# Altium PCB uku201.PcbDoc
Units mm, origin at the board's own origin, x right, y up, seen from the top; angles counter-clockwise.
Board outline 144.5 x 170.55 mm, 2 copper layers (Top Layer, Bottom Layer); 110 components, 672 nets, 418 pads, 156 vias.
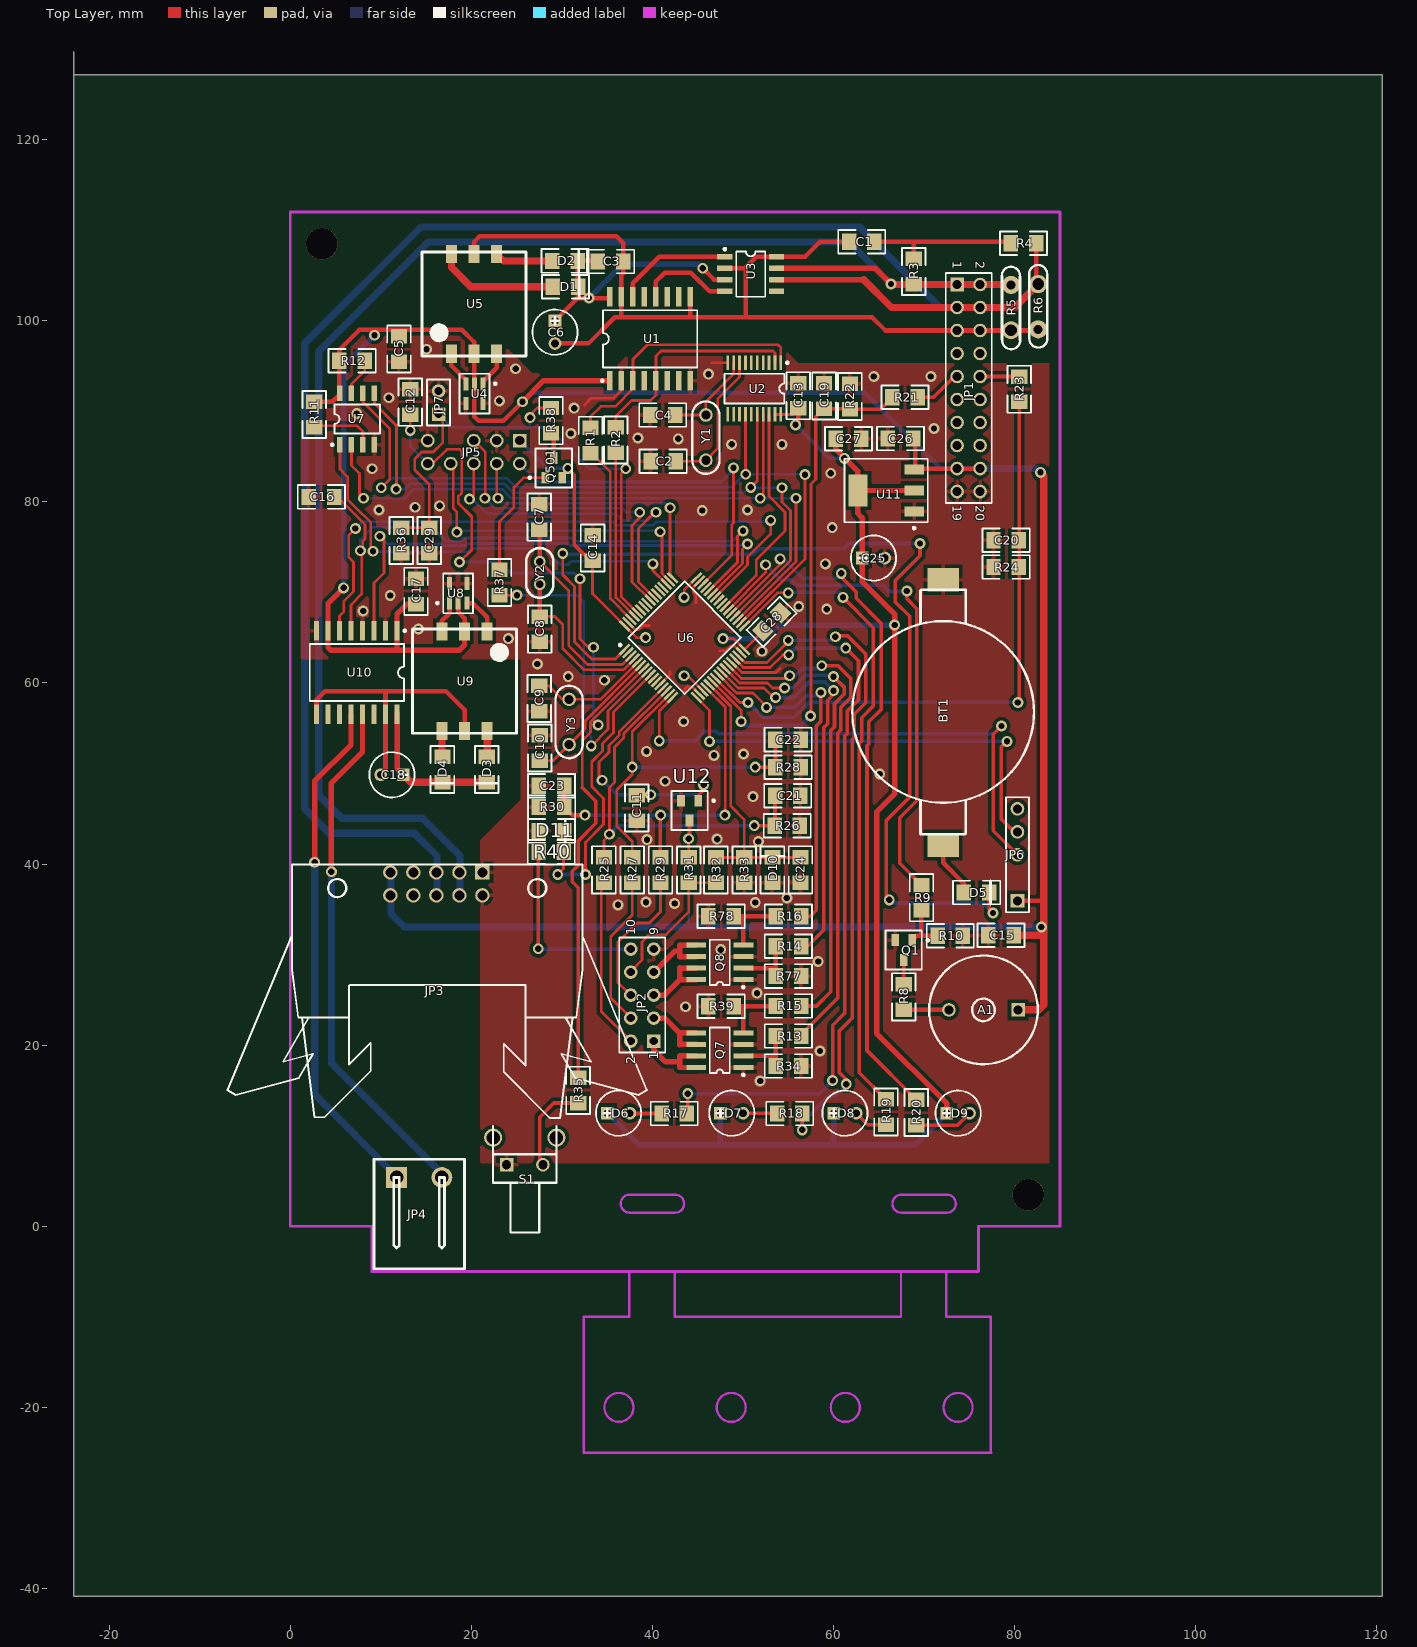
[diagram p0: Top Layer view]
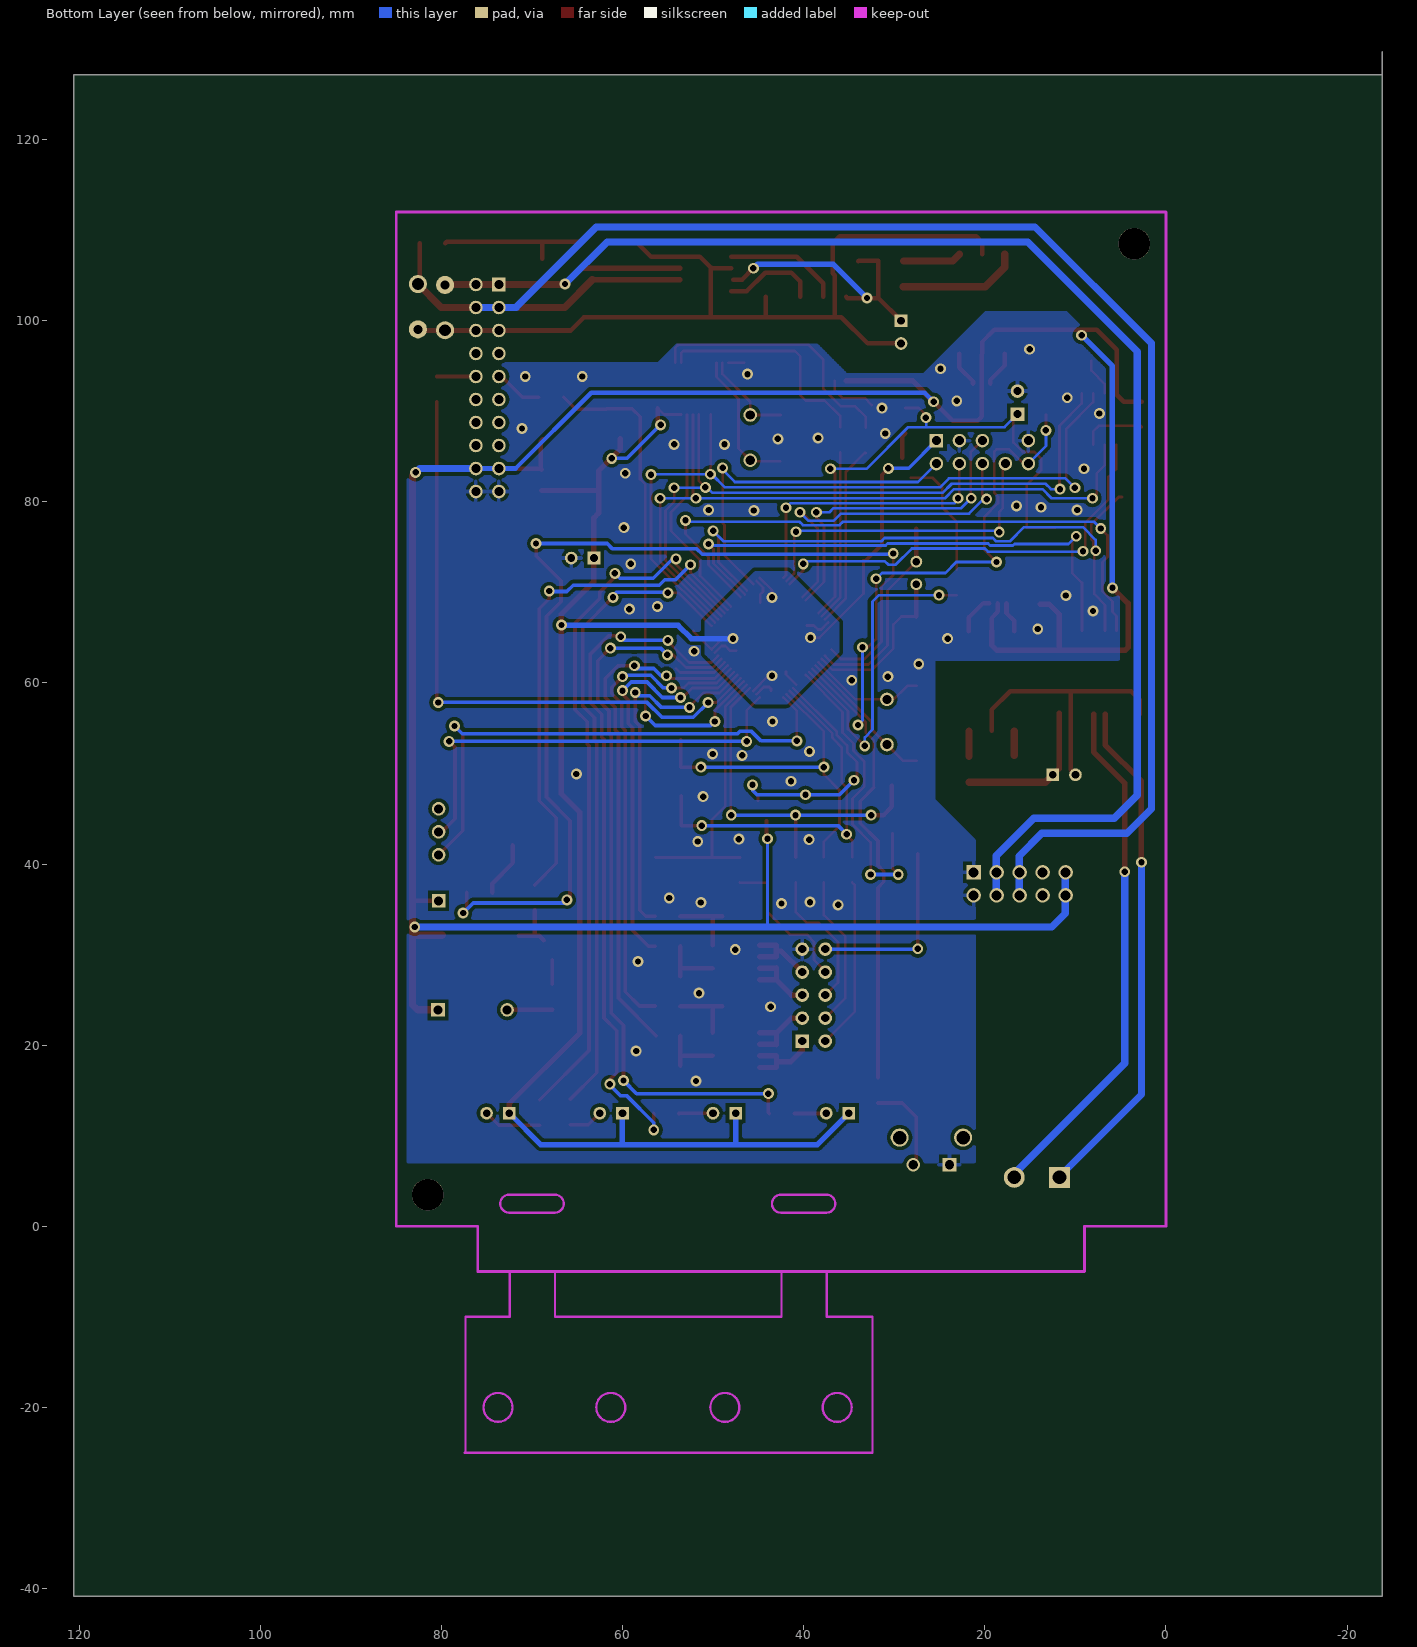
[diagram p1: Bottom Layer view, seen from below]

## Layer stack, top to bottom
Top Layer: signal copper 0.0356
Dielectric: dielectric 0.32, FR-4, Dk 4.8
Bottom Layer: signal copper 0.0356

## Board outline
-23.9,129.7 -23.9,-40.85 120.6,-40.85 120.6,127.15 -23.9,127.15

## Design rules (kind name [scope] priority, off if disabled: settings)
Clearance Keep_Out [OnLayer('Keep-Out Layer') vs not OnLayer('Top Overlay')] p1: gap=1
Clearance Holes [InPoly vs HasPad('Free-0') Or HasPad('Free-1') Or HasPad('Free-2') Or HasPad('Free-3')] p2: gap=2
Clearance Clearance_3 [InPoly and InNet(NetC500_1)] p3: gap=1
Clearance Poly [InPoly] p4: gap=0.4
Clearance [All] p5: gap=0.18
ComponentClearance [All] p1: gap=0.254 collisioncheckmode=0
HoleSize [All] p1: absolutevalues=TRUE maxlimit=5 minlimit=0 maxpercent=80.000 minpercent=20.000
PolygonConnect PolygonConnect_2 [InNet('NetC500_1')] p1: connectstyle=Relief reliefconductorwidth=1 reliefentries=4 polygonreliefangle="90 Angle"
PolygonConnect PolygonConnect_1 [InNet(NetC100_2)] p2: connectstyle=Direct reliefconductorwidth=0.254 reliefentries=4 polygonreliefangle="90 Angle"
PolygonConnect [All] p3: connectstyle=Relief reliefconductorwidth=0.4 reliefentries=4 polygonreliefangle="90 Angle"
RoutingLayers [All] p1: top layer=Horizontal bottom layer=Vertical
RoutingVias [All] p1: holewidth=0.7 width=1.2 viastyle="Through Hole" minholewidth=0.6 minwidth=1.1 maxholewidth=0.7 maxwidth=1.2
SolderMaskExpansion [All] p1: expansion=0.102
TestPointUsage [All] p1: valid=0 allowmultiple=FALSE
Testpoint [All] p1: side=15 testpointundercomponent=TRUE minsize=1.016 maxsize=2.54 preferedsize=1.524 minholesize=0 maxholesize=1.016 preferedholesize=0.813 testpointgrid=0.025 style=1023 order=1234567890
Width [All] p1: maxlimit=5 minlimit=0.2 preferedwidth=0.254 toplayer_prefwidth=0.5 bottomlayer_prefwidth=0.4 minimp=50.000000 maximp=50.000000 favimp=50.000000
15 further rules are at their usual default settings.

## Classes and differential pairs
component class cpu_board: A1 A7 BT1 C7 C8 C9 C10 C11 C12 C13 C14 C15 C19 C20 C21 C22 C23 C24 C25 C26 C27 C28 C29 C? D5 D6 D7 D8 D9 D10 D11 JP1 JP2 JP3 JP4 JP5 JP6 JP7 NetC20_1 Q1 Q7 Q8 Q501 R8 R9 R10 R11 R12 R13 R14 R15 R16 R17 R18 R19 R20 R21 R22 R23 R24 R25 R26 R27 R28 R29 R30 R31 R32 R33 R34 R35 R36 R37 R38 R39 R40 R77 R78 S1 U6 U7 U11 U12 U? Y2 Y3
component class RS485: C16 C17 C18 D3 D4 U8 U9 U10
component class CAN: C1 C2 C3 C4 C5 C6 D1 D2 R1 R2 R3 R4 R5 R6 U1 U2 U3 U4 U5 Y1

## Components (designator, comment, footprint, x,y, rotation, side; value= is the part's Value field where it differs from the comment)
A1 "HCM1205X" zumm 76.55,23.9 r180 top (schematic designator A?)
BT1 "796136-1" BAT_HOLD_SMD 72.1,42.1 r90 top
C1 "100n" _1206 63.1,108.7 r180 top
C2 "10pF" _1206 41.2,84.5 r0 top (schematic designator C?)
C3 "22.0" _1206 35.4,106.55 r0 top
C4 "10pF" _1206 41.15,89.6 r0 top
C5 "1.0" _1206 12,96.9 r90 top
C6 "LXZ 220x16" el3 29.25,100 r270 top
C7 "33pF" _1206 27.5,78.3 r270 top
C8 "33pF" _1206 27.55,65.95 r90 top
C9 "10pF" _1206 27.5,58.3 r90 top
C10 "10pF" _1206 27.55,52.8 r270 top
C11 "10.0" _1206 38.25,46.2 r90 top
C12 "1.0" _1206 13.25,91 r270 top
C13 "1.0" _1206 56.1,91.7 r270 top
C14 "1.0" _1206 33.4,74.9 r270 top
C15 "1.0" _1206 78.5,32.15 r0 top
C16 "1n0" _1206 3.45,80.55 r0 top
C17 "1.0" _1206 13.9,70.1 r270 top
C18 "LXZ 220x16" el3 12.5,49.85 r180 top
C19 "1.0" _1206 58.95,91.7 r90 top
C20 "1.0" _1206 79.05,75.75 r180 top
C21 "1.0" _1206 54.95,47.55 r0 top
C22 "1.0" _1206 55,53.75 r0 top
C23 "1.0" _1206 28.85,48.65 r180 top
C24 "1.0" _1206 56.359,39.35 r270 top
C25 "LXZ 220x16" el3 63.15,73.8 r0 top (schematic designator C?)
C26 "1.0" _1206 67.4,87 r0 top
C27 "1.0" _1206 61.65,86.95 r180 top
C28 "1.0" _1206 53.15,66.75 r225 top
C29 "1.0" _1206 15.35,75.75 r90 top
D1 "MBR0520" _1206d 30.4,103.75 r180 top
D2 "MBR0520" _1206d 30.35,106.597 r180 top
D3 "MBR0520" _1206d 21.7,50.45 r90 top
D4 "MBR0520" _1206d 16.8,50.45 r90 top
D5 "BAV103" _1206d 75.8,36.85 r180 top
D6 "LED0" el3 35,12.5 r0 top
D7 "LED0" el3 47.5,12.5 r0 top
D8 "LED0" el3 60,12.5 r0 top
D9 "LED0" el3 72.5,12.5 r0 top
D10 "BZV55-C5V6" _1206d 53.259,39.35 r270 top
D11 "BZV55-C3V3" _1206d 28.852,43.65 r180 top
JP1 "PBD-10" HDR2X10 73.65,104 r270 top (schematic designator JP?)
JP2 "PBD-10" HDR2X5 40.15,20.45 r90 top
JP3 "LBH-10R" SCM-10MR 6,36.55 r0 top
JP4 "Header 2" 2EDGR-5.0-2P 11.75,5.4 r0 top
JP5 "CORTEX_DEBUG_CONNECTOR_PAL" CORTEX_DEBUG_CONNECTOR 25.35,86.75 r180 top
JP6 "UART_PORT" HDR1X5_uart 80.3,35.95 r90 top
JP7 "2EDGR-5.08-02P" HDR1X2 16.4,89.7 r90 top
Q1 "BC847" SO-G3 67.75,30.5 r180 top
Q7 "IRF7103" SO-G8/Y2.2 47.45,19.45 r90 top
Q8 "IRF7103" SO-G8/Y2.2 47.45,29.15 r90 top
Q501 "BC856" SO-G3 29.1,83.75 r0 top
R1 "0R" _1206 33.15,86.8 r90 top
R2 "0R" _1206 35.95,86.85 r90 top
R3 "560R" _1206 68.85,105.45 r90 top (schematic designator R?)
R4 "560R" _1206 81,108.55 r0 top
R5 "JVR07N" JVR07N 79.6,103.95 r270 top
R6 "JVR07N" JVR07N 82.6,99.05 r90 top
R8 "22R" _1206 67.75,25.35 r90 top
R9 "5K1" _1206 69.7,36.3 r90 top
R10 "10K" _1206 72.897,32.1 r0 top
R11 "2K7" _1206 2.65,89.65 r90 top
R12 "2K7" _1206 6.85,95.6 r0 top
R13 "1K0" _1206 55,21.008 r180 top
R14 "1K0" _1206 55,30.932 r180 top
R15 "1K0" _1206 55,24.316 r180 top
R16 "1K0" _1206 55,34.24 r180 top
R17 "1K0" _1206 42.4,12.45 r180 top
R18 "1K0" _1206 55.15,12.45 r180 top
R19 "1K0" _1206 65.8,12.6 r270 top
R20 "1K0" _1206 69.15,12.55 r270 top
R21 "33K" _1206 67.9,91.55 r0 top
R22 "1K0" _1206 61.8,91.65 r90 top
R23 "33K" _1206 80.5,92.45 r90 top
R24 "1K0" _1206 79.05,72.8 r180 top
R25 "10K" _1206 34.65,39.35 r270 top
R26 "1K0" _1206 54.9,44.25 r0 top
R27 "10K" _1206 37.777,39.35 r270 top
R28 "1K0" _1206 55,50.7 r0 top
R29 "10K" _1206 40.891,39.35 r270 top
R30 "1K0" _1206 28.859,46.3 r180 top
R31 "1K0" _1206 43.991,39.35 r90 top
R32 "2K7" _1206 47.005,39.35 r90 top
R33 "10K" _1206 50.119,39.35 r90 top
R34 "10K" _1206 55,17.7 r180 top
R35 "10K" _1206 31.8,15 r270 top
R36 "10K" _1206 12.25,75.75 r90 top
R37 "100R" _1206 23.1,71.1 r90 top
R38 "100R" _1206 28.8,88.95 r270 top
R39 "10K" _1206 47.6,24.316 r0 top
R40 "10K" _1206 28.838,41.35 r0 top
R77 "10K" _1206 55,27.624 r180 top
R78 "10K" _1206 47.6,34.24 r0 top
S1 "SWT-3" SWT-6R 25.9,6.8 r90 top
U1 "ISO7231" SO-G16/D10.4 39.75,98 r0 top
U2 "MCP2515" TSSO6X6-G20/D6.6 51.25,92.5 r180 top
U3 "TJA1050" SO-G8/D5 50.85,105.15 r270 top
U4 "SN6501DBVR" SO-G5/P.95 20.35,91.95 r180 top
U5 "II 130 404 21 01" II1304042101 20.3,101.85 r0 top
U6 "STM32F103RC" F-QFP10X10-G64/N 43.55,65 r45 top
U7 "25LC640" SO-G8/D5 7.4,89.15 r0 top
U8 "SN6501DBVR" SO-G5/P.95 18.55,69.9 r0 top
U9 "II 130 404 21 01" II1304042101 19.25,60.2 r180 top
U10 "ADM2483" SO-G16/D10.4 7.35,61.15 r180 top
U11 "LD1117-3.3" DSO-G3 65.8,81.25 r90 top (schematic designator U?)
U12 "AD158X" so-g3 44.1,45.9 r180 top
Y1 "8MGz" QWARZ1 45.9,89.6 r270 top
Y2 "32768" QWARZ2 27.55,73.4 r270 top
Y3 "10MGz" QWARZ1 30.8,58.2 r270 top (schematic designator Y?)

## Footprints (in the part's own frame and the unit in brackets; to place one, negate y for a bottom-side part, rotate by r counter-clockwise, add the part's x,y. Pads: shape width x height; smd on the part's side, far side on the other; paste and mask are expansions set on the pad)
2EDGR-5.0-2P [mm] "2EDGR-5.0-2P"
  rect 2.3x2.3 hole 1.5: 1(0,0)
  round 2.3 hole 1.5: 2(5,0)
  silkscreen extent -2.5,-10.1 7.5,2
_1206 [mm]
  rect 1.6x1.8 smd: 1(-1.412,-0.007) 2(1.388,-0.007)
  silkscreen extent -2.61,-1.31 2.59,1.29
_1206d [mm]
  rect 1.6x1.8 smd: 1(1.395,-0.009) 2(-1.405,-0.009)
  silkscreen extent -2.6,-1.31 2.6,1.29
BAT_HOLD_SMD [mm]
  rect 2.6x3.5 smd: 1(0,0) 2(29.3,0)
  silkscreen extent 1.2,-10.03 28.2,10.03
CORTEX_DEBUG_CONNECTOR [mm]
  rect 1.5x1.5 hole 1: 1(0.001,-0.012)
  round 1.5 hole 1: 2(0.001,2.528) 3(2.541,-0.012) 4(2.541,2.528) 5(5.081,-0.012) 6(5.081,2.528) 8(7.621,2.528) 9(10.161,-0.012) 10(10.161,2.528)
DSO-G3 [mm]
  rect 1.1x2.15 smd: 1(-2.3,-3.1) 2(0,-3.1) 3(2.3,-3.1)
  rect 3.5x2.15 smd: 4(0,3.1)
  silkscreen extent -4.27,-4.6 3.5,4.6
el3 [mm]
  rect 1.4x1.4 hole 0.85: 1(0.011,-0.008)
  round 1.4 hole 0.85: 2(2.511,-0.008)
  silkscreen extent -1.24,-2.5 3.76,2.49
F-QFP10X10-G64/N [mm]
  rect 1.6x0.3 smd: 1(-5.598,3.754) 2(-5.598,3.254) 3(-5.598,2.754) 4(-5.598,2.254) 5(-5.598,1.754) 6(-5.598,1.254) 7(-5.598,0.754) 8(-5.598,0.254) 9(-5.598,-0.246) 10(-5.598,-0.746) 11(-5.598,-1.246) 12(-5.598,-1.746) 13(-5.598,-2.246) 14(-5.598,-2.746) 15(-5.598,-3.246) 16(-5.598,-3.746) 33(5.602,-3.746) 34(5.602,-3.246) 35(5.602,-2.746) 36(5.602,-2.246) 37(5.602,-1.746) 38(5.602,-1.246) 39(5.602,-0.746) 40(5.602,-0.246) 41(5.602,0.254) 42(5.602,0.754) 43(5.602,1.254) 44(5.602,1.754) 45(5.602,2.254) 46(5.602,2.754) 47(5.602,3.254) 48(5.602,3.754)
  rect 0.3x1.6 smd: 17(-3.748,-5.596) 18(-3.248,-5.596) 19(-2.748,-5.596) 20(-2.248,-5.596) 21(-1.748,-5.596) 22(-1.248,-5.596) 23(-0.748,-5.596) 24(-0.248,-5.596) 25(0.252,-5.596) 26(0.752,-5.596) 27(1.252,-5.596) 28(1.752,-5.596) 29(2.252,-5.596) 30(2.752,-5.596) 31(3.252,-5.596) 32(3.752,-5.596) 49(3.752,5.604) 50(3.252,5.604) 51(2.752,5.604) 52(2.252,5.604) 53(1.752,5.604) 54(1.252,5.604) 55(0.752,5.604) 56(0.252,5.604) 57(-0.248,5.604) 58(-0.748,5.604) 59(-1.248,5.604) 60(-1.748,5.604) 61(-2.248,5.604) 62(-2.748,5.604) 63(-3.248,5.604) 64(-3.748,5.604)
  silkscreen extent -5.72,-4.4 4.4,4.58
HDR1X2 [mm]
  rect 1.5x1.5 hole 0.9: 1(-0.005,0.012)
  round 1.5 hole 0.9: 2(2.535,0.012)
  silkscreen extent -1.28,-1.26 3.8,1.28
HDR1X5_uart [mm]
  rect 1.5x1.5 hole 1: 1(-0.008,-0.009)
  round 1.5 hole 1: 3(5.072,-0.009) 4(7.612,-0.009) 5(10.152,-0.009)
  silkscreen extent -1.28,-1.28 11.42,1.26
HDR2X5 [mm]
  rect 1.5x1.5 hole 0.9: 1(0,0)
  round 1.5 hole 0.9: 2(0,2.54) 3(2.54,0) 4(2.54,2.54) 5(5.08,0) 6(5.08,2.54) 7(7.62,0) 8(7.62,2.54) 9(10.16,0) 10(10.16,2.54)
  silkscreen extent -1.27,-1.27 11.43,3.81
HDR2X10 [mm]
  rect 1.5x1.5 hole 1: 1(0,0)
  round 1.5 hole 1: 2(0,2.54) 3(2.54,0) 4(2.54,2.54) 5(5.08,0) 6(5.08,2.54) 7(7.62,0) 8(7.62,2.54) 9(10.16,0) 10(10.16,2.54) 11(12.7,0) 12(12.7,2.54) 13(15.24,0) 14(15.24,2.54) 15(17.78,0) 16(17.78,2.54) 17(20.32,0) 18(20.32,2.54) 19(22.86,0) 20(22.86,2.54)
  silkscreen extent -1.27,-1.27 24.13,3.81
II1304042101 [mm]
  rect 1.2x2 smd: 1(-2.5,-5.5) 2(0,-5.5) 3(2.5,-5.5) 4(2.5,5.5) 5(0,5.5) 6(-2.5,5.5)
  silkscreen extent -5.75,-5.75 5.75,5.75
JVR07N [mm]
  round 2 hole 1: 1(0,0)
  round 2 hole 1.3: 2(5,0)
  silkscreen extent -2.01,-1.02 7.09,1.02
QWARZ1 [mm]
  round 1.5 hole 1: 1(0.008,0) 2(5.008,0)
  silkscreen extent -1.49,-1.5 6.51,1.5
QWARZ2 [mm]
  round 1.3 hole 0.85: 1(0.001,0.005) 2(2.501,0.005)
  silkscreen extent -1.5,-1.5 4,1.5
SCM-10MR [mm]
  rect 1.6x1.6 hole 1.1: 1(15.228,2.538)
  round 1.6 hole 1.1: 2(15.228,-0.002) 3(12.688,2.538) 4(12.688,-0.002) 5(10.148,2.538) 6(10.148,-0.002) 7(7.608,2.538) 8(7.608,-0.002) 9(5.068,2.538) 10(5.068,-0.002)
  silkscreen extent -12.96,-24.6 33.41,3.4
SO-G3 [mm]
  rect 0.85x1.3 smd: 1(-0.948,-1.102) 2(0.952,-1.102) 3(0.002,1.098)
  silkscreen extent -2.77,-2.15 2,2.15
so-g3 [mm]
  rect 0.85x1.3 smd: 1(-0.948,-1.102) 2(0.952,-1.102) 3(0.002,1.098)
  silkscreen extent -2.77,-2.15 2,2.15
SO-G5/P.95 [mm]
  rect 0.55x1.45 smd: 1(-0.95,-1.075) 2(0,-1.075) 3(0.95,-1.075) 4(0.95,1.075) 5(-0.95,1.075)
  silkscreen extent -2.43,-2.2 1.65,2.2
SO-G8/D5 [mm]
  rect 0.6x1.7 smd: 1(-1.905,-2.85) 2(-0.635,-2.85) 3(0.635,-2.85) 4(1.905,-2.85) 5(1.905,2.85) 6(0.635,2.85) 7(-0.635,2.85) 8(-1.905,2.85)
  silkscreen extent -2.88,-2.97 2.5,1.6
SO-G8/Y2.2 [mm]
  rect 0.55x2.2 smd: 1(-1.91,-2.588) 2(-0.64,-2.588) 3(0.63,-2.588) 4(1.9,-2.588) 5(1.9,2.612) 6(0.63,2.612) 7(-0.64,2.612) 8(-1.91,2.612)
  silkscreen extent -2.86,-2.71 2.49,1.11
SO-G16/D10.4 [mm]
  rect 0.6x2.15 smd: 1(-4.445,-4.625) 2(-3.175,-4.625) 3(-1.905,-4.625) 4(-0.635,-4.625) 5(0.635,-4.625) 6(1.905,-4.625) 7(3.175,-4.625) 8(4.445,-4.625) 9(4.445,4.625) 10(3.175,4.625) 11(1.905,4.625) 12(0.635,4.625) 13(-0.635,4.625) 14(-1.905,4.625) 15(-3.175,4.625) 16(-4.445,4.625)
  silkscreen extent -5.42,-4.75 5.2,3.15
SWT-6R [mm]
  round 2 hole 1.5: 0(3,3.5) 0(3,-3.5)
  rect 1.5x1.5 hole 1: 1(0,2)
  round 1.5 hole 1: 2(0,-2)
  silkscreen extent -7.48,-3.5 4.28,3.5
TSSO6X6-G20/D6.6 [mm]
  rect 0.3x1.6 smd: 1(-2.925,-2.85) 2(-2.275,-2.85) 3(-1.625,-2.85) 4(-0.975,-2.85) 5(-0.325,-2.85) 6(0.325,-2.85) 7(0.975,-2.85) 8(1.625,-2.85) 9(2.275,-2.85) 10(2.925,-2.85) 11(2.925,2.85) 12(2.275,2.85) 13(1.625,2.85) 14(0.975,2.85) 15(0.325,2.85) 16(-0.325,2.85) 17(-0.975,2.85) 18(-1.625,2.85) 19(-2.275,2.85) 20(-2.925,2.85)
  silkscreen extent -3.75,-2.97 3.3,1.65
zumm [mm]
  rect 1.5x1.5 hole 1: 1(-3.825,0)
  round 1.5 hole 1: 2(3.81,0)
  silkscreen extent -6,-6 6,6

## Part data
A1: library part PJEZ0, "Beeper"
BT1: library part Battery, "Multicell Battery"
C1 C2 C3 C4 C7 C8 C16: library part "Cap Semi", "Capacitor (Semiconductor SIM Model)"
C5 C17: library part C_SM_1206
C6 C18: library part K50-35
C9 C10 C11 C12 C13 C14 C15 C19 C20 C21 C22 C23 C24 C26 C27 C28 C29: library part "Cap Semi", "Capacitor"
C25: library part "Cap Pol1", "Polarized Capacitor (Radial)"
D1 D2 D3 D4 D5: library part Diode, "Default Diode"
D6 D7 D8 D9: "Typical INFRARED GaAs LED"
D10 D11: library part "D Zener", "Zener Diode"
JP1 JP2: library part "Header 5X2", "Header, 5-Pin, Dual row"
JP3: library part "Header 10", "Header, 10-Pin"
JP4: "Header, 2-Pin"
JP6: "Header, 5-Pin"
JP7: library part "Header 2", "Header, 2-Pin"
Q1: library part BC847ALT1, "General Purpose Transistor NPN Silicon"
Q7 Q8: library part IRF7301, "FET"
Q501: library part GT109, "Bipolar transistor"
R1 R2 R3 R4 R8 R9 R10 R11 R12 R13 R14 R15 R16 R17 R18 R19 R20 R21 R22 R23 R24 R25 R26 R27 R28 R29 R30 R31 R32 R33 R34 R39 R40 R77 R78: library part Res2, "Resistor"
R5 R6: library part "Res Varistor", "Varistor (Voltage-Sensitive Resistor)"
R35 R36 R37 R38: library part RES, "Resistor"
S1: library part SWT-6, "Switch"
U4 U5 U8 U9: library part PIN6
U6: "STM32 ARM-based 32-bit MCU with 64 Kbytes Flash, 64-pin LQFP, Industrial Temperature"
U7: "Memory"
U11: library part REG1117-3.3, "800mA and 1A Low Dropout Positive Regulator 2.85V, 3.3V, 5V, and Adjustable"
Y1 Y2 Y3: library part XTAL, "Crystal Oscillator"

## Free pads (board coordinates)
  round 3.5 hole 3.5: 9(81.5,3.5) 10(3.5,108.5)

## Via types
v1: diameter 1.2, hole 0.7, Top Layer to Bottom Layer, 156 vias

## Nets (pads, with @x,y where several pads share a name; then routed paths per layer and width w, separated by ;. In a path a pad name is that pad's centre, name@x,y a point inside that pad or via, vN(x,y) a via of type N, cw(c..) or ccw(c..) an arc to the next point about the centre after c; other vN are vias at no path point)
+3V3: C13.2 C14.2 C25.1 C27.2 C28.2 D6.1 D7.1 D8.1 D9.1 JP5.1 Q501.2 U2.19 U2.20 U6.19 U6.32 U6.48 U6.64 U11.2 U11.4 | length 206.7
  Top Layer w0.3: C14.2 33.393,69.856 38.249,65 v1(39.25,65) ; v1(43.5,60.8) 43.863,60.8 U6.19 ; v1(43.5,69.45) 43.5,70.259 U6.48 ; v1(47.8,64.9) 48.956,64.9 U6.32 52.164,65.7 C28.2 ; U2.19 55.431,89.65 C13.2
  Top Layer w0.4: v1(30.65,83.7) 31.35,83 31.35,75.3 33.138,73.512 C14.2
  Top Layer w0.5: v1(55.8,88.5) 55.85,88.5 56.093,88.743 C13.2
  Top Layer w0.6: C27.2 60.262,85.788 62.65,83.4 62.65,78.75 63.161,78.239 63.161,71.189 66.75,67.6 66.75,47.75 64.75,45.75 64.75,21.3 72.511,13.539 D9.1 ; U11.4 U11.2
  Bottom Layer w0.4: JP5.1 28.412,83.7 v1(30.65,83.7) ; v1(55.8,88.5) 59.5,84.8 v1(61.197,84.8)
  Bottom Layer w0.6: D6.1 38.503,9 69.02,9 D9.1 ; 47.511,9.061 D7.1 ; v1(47.8,64.9) 52.4,64.9 53.85,66.35 66.7,66.35 v1(66.75,66.4) ; 60.011,9.189 D8.1
+5V: A1.1 C5.2 C15.2 C17.2 C26.2 JP1.17 JP1.18 JP3.9 JP3.10 JP6.1 R11.2 R12.1 R31.2 U1.1 U4.2 U5.2 U7.8 U8.2 U9.2 U10.1 U10.7 U11.3 U12.3 | length 344.7
  Top Layer w0.3: R31.2 v1(43.998,42.798)
  Top Layer w0.4: v1(43.998,42.798) 44.098,42.898 U12.3
  Top Layer w0.5: R11.2 4.638,91.038 5.5,91.9 5.438,91.962 R12.1 5.438,96.788 7.65,99 18.95,99 20.3,97.65 U5.2 20.35,96.3 U4.2 20.35,89.4 20.8,88.95 23.55,88.95 v1(25.65,91.05) ; U8.2 18.55,67.85 19.25,67.15 U9.2 ; C26.2@68.8,86.9 69.03,86.67 U11.3@69.03,83.68 ; U11.3 U11.3@69.03,83.68 ; JP1.18 U11.3@69.03,83.68 ; JP6.1 83.192,35.942 83.2,35.95 ; v1(82.95,33.05) v1@83.2,33.3
  Top Layer w0.6: v1(5.9,70.503) 4.175,68.778 4.175,63.925 4.5,63.6 18.65,63.6 19.25,64.2 U9.2 ; 11.85,63.6 11.795,63.655 11.795,67.595 12.912,68.712 C17.2 ; v1(25.65,91.05) 27.975,93.375 U1.1
  Top Layer w0.8: C15.2 82.907,32.143 83.2,31.85 ; A1.1 82.65,23.9 83.2,24.45 83.2,82.9 v1(82.85,83.25)
  Bottom Layer w0.3: 43.95,33.05 43.998,33.098 v1(43.998,42.798)
  Bottom Layer w0.5: v1(25.65,91.05) 26.65,92.05 63.45,92.05 71.82,83.68
  Bottom Layer w0.6: v1(5.9,70.503) 5.9,95 v1(9.3,98.4) ; 71.82,83.68 JP1.18
  Bottom Layer w0.8: JP3.9@11.118,39.088 11.118,34.532 12.6,33.05 v1(82.95,33.05) ; JP1.18 82.42,83.68 v1(82.85,83.25)
-5V: 
A0: C21.1 R25.1 R26.1 U6.14 | length 43.1
  Top Layer w0.3: R25.1 34.643,42.593 35.25,43.2 35.25,48.45 35.8,49 35.8,52.9 36.7,53.8 36.7,53.821 36.83,53.951 36.83,54.397 U6.14
  Top Layer w0.4: v1@51.257,44.243 R26.1 53.538,44.293 C21.1
  Bottom Layer w0.4: v1(35.25,43.3) 36.2,44.25 v1(51.25,44.25)
A1: C22.1 R27.1 R28.1 U6.15 | length 40
  Top Layer w0.3: R27.1 37.77,42.48 36.05,44.2 36.05,48.15 37.77,49.87 37.77,54.63 U6.15
  Top Layer w0.4: v1(51.35,50.7) 51.357,50.693 R28.1 C22.1
  Bottom Layer w0.4: v1(37.77,50.7) v1(51.35,50.7)
A2: JP6.3 U6.16 | length 59.8
  Top Layer w0.3: v1(40.75,53.6) 40.75,56.903 U6.16
  Top Layer w0.4: v1(78.55,55.25) 77.65,54.35 77.65,43.682 JP6.3
  Bottom Layer w0.4: v1(40.75,53.6) 44.7,53.6 45.75,54.65 47.05,54.65 47.3,54.4 77.7,54.4 v1(78.55,55.25)
A3: JP6.4 U6.17 | length 49.5
  Top Layer w0.3: U6.17 46.3,56.949 v1(46.3,53.55)
  Top Layer w0.4: v1(79.15,53.55) 78.5,52.9 78.5,45 79.938,43.562 JP6.4
  Bottom Layer w0.4: v1(46.3,53.55) v1(79.15,53.55)
A4: C23.1 R29.1 R30.1 U6.20 | length 40.1
  Top Layer w0.3: U6.20 48.05,57.32 48.05,45.45 v1(48,45.4)
  Top Layer w0.4: C23.1@30.2,48.656 C23.1@30.2,48.7 ; R29.1 40.884,45.384 v1(40.9,45.4)
  Top Layer w0.5: C23.1 30.262,46.316 31.178,45.4 v1@32.5,45.4
  Bottom Layer w0.4: v1@32.5,45.4 v1(48,45.4)
  other v1: 32.55,45.4
A5: C24.1 D10.2 R32.2 R33.2 U6.21 | length 30
  Top Layer w0.3: U6.21 48.65,57.427 48.65,46.4 50.125,44.925 R33.2 ; R32.2 56.328,40.738 C24.1
A6: C19.1 R21.1 R22.1 U6.22 | length 56.7
  Top Layer w0.3: U6.22 49.8,56.985 v1(49.8,55.75) ; v1(57.45,56.35) 57.5,56.4 57.5,81.95 58.05,82.5
  Top Layer w0.4: 58.05,82.5 58.05,89.381 C19.1 61.757,90.288 R22.1 65.182,90.238 R21.1
  Bottom Layer w0.4: v1(49.8,55.75) 50.25,55.3 56.4,55.3 v1(57.45,56.35)
A7: C20.1 R23.1 R24.1 U6.23 | length 69.1
  Top Layer w0.3: U6.23 49.642,57.85 v1(50.55,57.85)
  Top Layer w0.4: v1(80.35,57.85) 80.507,58.007 R23.1
  Bottom Layer w0.4: v1(50.55,57.85) 52.2,56.2 55.65,56.2 57.3,57.85 v1(80.35,57.85)
A9: U6.42 U10.6 | length 70.1
  Top Layer w0.3: U10.6 5.445,67.395 5.9,67.85 5.9,69 7,70.1 7,73.35 6.45,73.9 6.45,76.3 v1(7.2,77.05) ; U6.42 50.392,72.908 ; v1(53.05,77.95) 53.05,76.45 50.5,73.9 50.5,73.017 ; 50.392,72.908 50.5,73.017 ; 50.392,72.908 50.5,73.017
  Bottom Layer w0.3: v1(7.2,77.05) 7.95,77.8 35.65,77.8 36.03,77.42 40.07,77.42 40.45,77.8 52.9,77.8 v1(53.05,77.95)
A10: U6.43 U10.3 | length 59.6
  Top Layer w0.3: U10.3 9.255,71.058 10.35,72.153 10.35,75.75 v1(9.9,76.2) ; U6.43@46.5,69.75 49.95,73.2 49.95,74.8 v1(50.5,75.35)
  Bottom Layer w0.3: v1(9.9,76.2) 10.75,75.35 16.721,75.35 16.901,75.17 19.4,75.17 19.63,75.4 30.72,75.4 30.95,75.17 50.32,75.17 v1(50.5,75.35)
A11: C16.2 U6.44 U10.5 | length 70.7
  Top Layer w0.3: C16.2 5.207,80.543 8.25,77.5 8.25,75.9 8,75.65 8,74.85 v1(7.75,74.6) 7.897,74.453 7.897,69.8 6.715,68.618 U10.5 ; U6.44 49.4,73.331 49.4,76.2 v1(50,76.8)
  Bottom Layer w0.3: v1(7.75,74.6) 7.75,75.8 9.15,77.2 15.65,77.2 17.2,75.65 18.75,75.65 19.1,76 31.05,76 31.4,75.65 48.85,75.65 v1(50,76.8)
A13: JP5.2 U6.46 | length 39.4
  Top Layer w0.3: U6.46 48.75,74.095 48.75,77.45 48.95,77.65 v1(48.95,83.75)
  Bottom Layer w0.3: JP5.2 27.371,82.2 47.6,82.2 48.95,83.55 v1(48.95,83.75)
A14: JP5.4 U6.49 | length 31.3
  Top Layer w0.3: v1@22.8,80.4 22.809,80.409 JP5.4 ; v1(41.95,79.35) 41.95,71.906 U6.49
  Bottom Layer w0.3: v1@22.8,80.4 23.35,79.85 41.45,79.85 v1(41.95,79.35)
  other v1: 22.95,80.4
A15: JP5.8 U6.50 | length 36.4
  Top Layer w0.3: JP5.8 18,83.951 18,79.3 18.4,78.9 v1(18.4,76.65) ; v1@41.05,76.8 41.05,72.099 U6.50
  Bottom Layer w0.3: v1(18.4,76.65) 18.55,76.8 v1@41.05,76.8
  other v1: 40.85,76.7
B0: R15.1 U6.26 | length 53.3
  Top Layer w0.3: U6.26 49.613,60 52.7,60 53.25,59.45 v1(54.6,59.45)
  Top Layer w0.4: R15.1 58.123,24.323 59.7,25.9 59.7,54.75 60.1,55.15 60.1,57.7 61.2,58.8 61.2,59.5 v1(60,60.7)
  Bottom Layer w0.4: v1(54.6,59.45) 55.5,59.45 56.9,60.85 59.85,60.85 v1(60,60.7)
B1: R13.1 U6.27 | length 57
  Top Layer w0.3: U6.27 49.82,60.5 54.85,60.5 v1(55.15,60.8)
  Top Layer w0.4: R13.1@56.3,21.05 60.45,25.2 60.45,54.45 60.8,54.8 60.8,57.3 61.9,58.4 61.9,60.5 60.5,61.9 v1(58.7,61.9)
  Bottom Layer w0.4: v1(55.15,60.8) 55.75,60.8 56.55,61.6 58.4,61.6 v1(58.7,61.9)
B3: JP5.6 U6.55 | length 37
  Top Layer w0.3: v1(19.8,80.3) 20.269,80.769 JP5.6 ; U6.55 38.45,71.163 38.45,77.05 40.25,78.85 v1(40.4,78.85)
  Bottom Layer w0.3: v1(19.8,80.3) 20.15,80.3 21.75,78.7 35.9,78.7 36.7,77.9 39.45,77.9 v1(40.4,78.85)
B4: JP5.5 U6.56 | length 35.6
  Top Layer w0.3: JP5.5 21.55,85.481 21.55,80.45 v1(21.5,80.4) ; v1(38.6,78.85) 38.6,78.25 37.75,77.4 37.75,71.156 U6.56
  Bottom Layer w0.3: v1(21.5,80.4) 22.6,79.3 36.7,79.3 37.15,78.85 v1(38.6,78.85)
B8: R2.1 U6.61 | length 18.9
  Top Layer w0.3: R2.1 35.957,69.414 U6.61
B9: R1.1 U6.62 | length 20.3
  Top Layer w0.3: R1.1 33.262,85.388 35.35,83.3 35.35,69.313 U6.62
B10: R17.1 U6.29 | length 81.9
  Top Layer w0.3: U6.29 50.034,61.7 53,61.7 54.4,63.1 v1(55.05,63.1)
  Top Layer w0.4: R17.1 43.9,12.544 v1(43.9,14.65) ; v1(59.9,16.1) 59.9,22.2 61.25,23.55 61.25,54.15 61.5,54.4 61.5,56.9 62.75,58.15 62.75,62.45 v1(61.35,63.85)
  Bottom Layer w0.4: v1(43.9,14.65) 58.45,14.65 v1(59.9,16.1) ; v1(55.05,63.1) 55.8,63.85 v1(61.35,63.85)
B11: R18.1 U6.30 | length 74.8
  Top Layer w0.3: U6.30 50.191,62.25 52.65,62.25 55,64.6 v1(55,64.7)
  Top Layer w0.4: v1(56.55,10.65) 56.562,10.662 R18.1 ; v1(60.2,65.1) 60.3,65.2 61.55,65.2 63.55,63.2 63.55,57.8 62.3,56.55 62.3,54 62.05,53.75 62.05,23 60.65,21.6 60.65,16.95 61.4,16.2 v1(61.4,15.7)
  Bottom Layer w0.4: v1(55,64.7) 59.8,64.7 v1(60.2,65.1) ; v1(56.55,10.65) 56.55,11.45 59.5,14.4 60.2,14.4 61.4,15.6 v1(61.4,15.7)
B12: R19.1 U6.33 | length 71.4
  Top Layer w0.3: U6.33 53.797,69.95 v1(55,69.95)
  Top Layer w0.4: v1(61.05,69.45) 64.4,66.1 64.4,57.45 63.1,56.15 63.1,53.6 62.85,53.35 62.85,16.956 R19.1
  Bottom Layer w0.4: v1(55,69.95) 55.05,70 60.7,70 61.05,69.65 v1(61.05,69.45)
B13: U2.14 U6.34 U7.6 | length 86.1
  Top Layer w0.3: U7.6 8.035,91.015 11,88.05 11,82.5 v1(10.05,81.55) ; U6.34 56.85,73.71 v1(56.85,83) ; U2.14 50.275,84.525 v1(50.3,83.05)
  Bottom Layer w0.3: v1(10.05,81.55) 11.1,82.6 23.95,82.6 24.95,81.6 48.7,81.6 50.15,83.05 v1@56.8,83.05
B14: U2.17 U6.35 U7.2 | length 80.4
  Top Layer w0.3: U7.2 6.765,84.035 7.65,83.15 7.65,80.85 v1(8.1,80.4) ; U6.35 55.85,73.417 v1(55.85,80.4) ; v1(51.9,80.4) 52.225,80.725 U2.17
  Bottom Layer w0.3: v1(8.1,80.4) 12.65,80.4 13.65,81.4 23.4,81.4 24.4,80.4 v1(55.85,80.4)
B15: U2.16 U6.36 U7.5 | length 80.6
  Top Layer w0.3: U7.5 9.305,90.845 11.75,88.4 11.75,81.45 v1(11.7,81.4) ; U6.36 55.25,73.524 55.25,79.05 54.3,80 v1(54.3,81.55) ; v1(50.85,81.6) 51.575,82.325 U2.16
  Bottom Layer w0.3: v1(11.7,81.4) 12.7,81.4 13.3,82 23.65,82 24.65,81 50.05,81 50.6,81.55 v1(54.3,81.55) ; v1@50.85,81.55 v1(50.85,81.6)
BOOT0: C29.2 JP7.1 R36.2 R38.1 U6.60 | length 62.6
  Top Layer w0.3: R36.2 C29.2 15.357,81.893 13.75,83.5 13.75,84.75 14.5,85.5 15.8,85.5 16.85,86.55 16.85,89.233 JP7.1 ; v1(26.5,89.3) 26.5,89.6 27.262,90.362 R38.1 ; v1(37.05,83.65) 36.55,83.15 36.55,69.527 U6.60
  Bottom Layer w0.3: JP7.1 17.833,88.25 28.45,88.25 33.05,83.65 v1(37.05,83.65) ; 26.45,88.25 26.45,89.25 v1(26.5,89.3)
C0: R37.1 U6.8 | length 36.6
  Top Layer w0.3: R37.1 25.038,69.688 v1(25.05,69.7) ; v1(33.25,53.05) 35.1,54.9 35.1,56.909 U6.8
  Bottom Layer w0.3: v1(25.05,69.7) 31.7,69.7 32.4,69 32.4,54.85 33.25,54 v1(33.25,53.05)
C1: D11.2 R40.2 U6.9 | length 33.9
  Top Layer w0.3: v1(29.55,38.85) 30.188,39.487 30.188,41.143 30.202,41.157 D11.2@30.202,43.409 ; v1(32.6,38.85) 32.6,42.4 34.597,44.397 34.597,47.25 33.297,48.55 33.297,51.297 34.497,52.497 34.497,53.307 35.7,54.51 35.7,56.802 U6.9
  Bottom Layer w0.4: v1(29.55,38.85) v1(32.6,38.85)
C4: R16.1 U6.24 | length 39.7
  Top Layer w0.3: U6.24 49.299,58.9 51.1,58.9 52.6,57.4 v1(52.6,57.3)
  Top Layer w0.4: R16.1 57.447,34.247 58.1,34.9 58.1,55.25 58.6,55.75 v1(58.6,58.95)
  Bottom Layer w0.4: v1(52.6,57.3) 55.7,57.3 57,58.6 58.25,58.6 v1(58.6,58.95)
C5: R14.1 U6.25 | length 44.7
  Top Layer w0.3: U6.25 49.456,59.45 52.3,59.45 53.35,58.4 v1(53.6,58.4)
  Top Layer w0.4: R14.1 57.139,30.939 58.9,32.7 58.9,55.05 59.35,55.5 59.35,58.1 60,58.75 v1(60,59.15)
  Bottom Layer w0.4: v1(53.6,58.4) 55.6,58.4 57.3,60.1 59.05,60.1 v1(60,59.15)
C6: R20.1 U6.37 | length 78.9
  Top Layer w0.3: U6.37 54.1,73.081 v1(54.1,73.7)
  Top Layer w0.4: v1(60.85,72.1) 60.85,71.7 62.5,70.05 62.5,69.35 65.25,66.6 65.25,57.05 63.9,55.7 63.9,53.25 63.7,53.05 63.7,19.406 R20.1
  Bottom Layer w0.4: v1(54.1,73.7) 54.45,73.7 56.6,71.55 60.3,71.55 v1(60.85,72.1)
C7: R9.2 U6.38 | length 58.2
  Top Layer w0.3: U6.38 52.5,72.188 v1(52.5,73.05)
  Top Layer w0.4: v1(68.1,70.15) 68.1,69.3 69.2,68.2 69.2,47 67.312,45.112 67.312,40.082 R9.2
  Bottom Layer w0.4: v1(52.5,73.05) 54.15,71.4 55.35,71.4 55.95,70.8 65.45,70.8 66.15,70.1 v1@68.1,70.1
C8: U2.18 U6.39 | length 24.7
  Top Layer w0.3: U6.39 51.45,71.845 51.45,73.6 54.65,76.8 54.65,78.85 52.875,80.625 U2.18
C10: U6.51 U7.1 | length 48.3
  Top Layer w0.3: U7.1 5.495,83.605 6.35,82.75 6.35,80.25 7.277,79.323 8.9,77.7 8.9,74.8 v1(9.15,74.55) v1@9.15,74.65 ; v1(40.05,73.15) 40.05,72.391 U6.51
  Bottom Layer w0.3: v1@9.15,74.5 19.65,74.5 20,74.85 28.05,74.85 29.85,73.05 30.65,73.05 31.05,73.45 39.75,73.45 v1(40.05,73.15)
CANH: JP1.1 JP1.2 JP3.3 JP3.4 R3.1 R5.1 U3.7 | length 168.7
  Top Layer w0.6: U3.7 64.615,105.785 v1@66.4,104
  Top Layer w0.8: v1@66.4,104 79.4,104 R5.1@79.65,104.25
  Bottom Layer w0.8: JP3.4@18.738,36.548 18.738,39.088 18.738,40.912 14.6,45.05 5.7,45.05 3.15,47.6 3.15,96.6 15.25,108.7 61.7,108.7 v1(66.35,104.05) v1@66.35,104.1
CANL: JP1.3 JP1.4 JP3.5 JP3.6 R4.2 R6.2 U3.6 | length 191.9
  Top Layer w0.5: R4.2 82.388,104.262 R6.2
  Top Layer w0.6: U3.6 63.335,104.515
  Top Layer w0.8: 63.335,104.515 66.39,101.46 80.01,101.46 R6.2
  Bottom Layer w0.8: JP3.6@16.198,36.548 16.198,40.902 13.7,43.4 4.3,43.4 1.6,46.1 1.6,97.5 14.45,110.35 62.9,110.35 71.74,101.51 71.74,101.46 JP1.4
GND: BT1.2 C2.1 C4.1 C5.1 C7.1 C8.1 C9.1 C10.1 C11.1 C12.1 C13.1 C14.1 C15.1 C16.1 C17.1 C19.2 C20.2 C21.2 C22.2 C23.2 C24.2 C25.2 C26.1 C27.1 C28.1 C29.1 D10.1 D11.1 JP1.19 JP1.20 JP2.9 JP3.1 JP3.2 JP5.3 JP5.9 JP7.2 Q1.2 Q7.1 Q7.3 Q8.1 Q8.3 R10.2 R22.2 R24.2 R26.2 R28.2 R30.2 R33.1 R34.1 R36.1 R39.1 R77.1 R78.1 S1.1 U1.2 U1.8 U2.10 U4.4 U4.5 U6.12 U6.18 U6.28 U6.31 U6.47 U6.63 U7.4 U8.4 U8.5 U10.2 U10.4 U10.8 U11.1 U12.2 | length 26.3
  Top Layer w0.3: 32.497,90.7 33.247,91.45 35.7,91.45 36.575,92.325 U1.2 ; U6.63 38.056,65.9 38.434,65.9 38.883,66.35 39.65,66.35 ; U6.12 41.95,60.931 41.95,61.25 ; 43.6,59.15 43.6,59.35 43.8,59.55 44.406,59.55 U6.18 ; 44.8,68.85 44.8,69.763 44.5,70.063 44.5,70.552 U6.47 ; 46.55,95.35 U2.10 ; 47.45,63.55 48.104,63.55 48.639,64.085 49.064,64.085 U6.31 ; U6.28 49.877,61.15 53.647,61.15 54.097,61.6
  other v1: 51.897,16.05 58.5,19.35 43.65,24.25 51.55,25.75 58.3,29.25 47.55,30.55 36.197,35.5 42.45,35.65 51.35,35.75 39.297,35.8 54.85,36.25 51.697,42.5 39.397,42.7 47.15,42.75 51.1,47.45 41.397,49.15 65.097,49.95 46.797,52 50.05,52.15 39.35,52.45 43.45,55.75 34.697,60.3 30.697,60.7 27.297,62.1 52.097,63.5 24.097,64.9 14.15,65.95 8.05,67.95 59.25,68.15 56.15,68.45 11.05,69.65 59.1,73.15 59.85,77.15 45.497,79.05 9.797,79.1 50.497,79.1 13.797,79.4 16.5,79.55 59.697,83.15 9.05,83.65 48.75,86.35 54.3,86.35 42.85,86.95 38.397,87.05 30.997,87.55 71.097,88.1 7.35,89.75 31.35,90.35 23.097,91.15 10.897,91.5 64.45,93.85 70.75,93.85 46.197,94.1 24.897,94.7 15.05,96.85
GND_485: C18.2 U9.5 U10.9 U10.15 | length 31
  Top Layer w0.5: U10.9 2.905,58.155 3.85,59.1 17.2,59.1 19.25,57.05 U9.5 ; C18.2 10.525,50.395 10.525,59.075 10.5,59.1
GND_CAN: C1.2 C3.2 C6.2 JP1.5 JP1.6 R5.2 R6.1 U1.9 U1.15 U3.2 U3.8 U5.5 | length 104.9
  Top Layer w0.5: U5.5 20.3,108.7 20.95,109.35 36,109.35 36.788,108.562 36.788,105.238 36.575,105.025 36.575,100.387 35.837,100.387 32.939,97.489 C6.2 ; 36.575,100.362 64.288,100.362 65.73,98.92 82.72,98.92 R6.1@82.8,99 ; 44.012,100.362 44.195,100.545 U1.9 ; U3.2 50.185,105.785 50.286,105.886 ; 50.3,100.362 50.286,100.376 50.286,105.886 ; C1.2 58.507,108.707 56.855,107.055 51.455,107.055 50.286,105.886
NetA1_2: A1.2 R8.1 | length 5
  Top Layer w0.5: R8.1 67.794,23.9 A1.2
NetBT1_1: BT1.1 D5.1 | length 6.2
  Top Layer w0.4: D5.1@74.4,36.864 D5.1
  Top Layer w0.5: BT1.1 72.1,40.15 74.405,37.845 D5.1
NetC1_1: C1.1 R3.2 R4.1 | length 17
  Top Layer w0.5: C1.1 79.424,108.707 R4.1 ; 68.85,108.707 68.857,108.7 R3.2
NetC2_2: C2.2 U2.8 Y1.2 | length 15.7
  Top Layer w0.3: C2.2 45.801,84.493 Y1.2 47.2,85.892 47.2,91.35 49.625,93.775 U2.8
NetC3_1: C3.1 C6.1 D1.2 D2.2 U1.16 U3.3 | length 30.6
  Top Layer w0.5: C6.1 31.755,102.502 ; C3.1 33.925,106.606 D2.2 31.755,102.502 ; U1.16 35.182,102.502 31.755,102.502 ; v1(45.55,105.8) 46.8,104.55 U3.3@47.8,104.55
  Bottom Layer w0.6: v1(33,102.502) 36.748,106.25 45.1,106.25 v1(45.55,105.8)
NetC4_2: C4.2 U2.9 Y1.1 | length 10.4
  Top Layer w0.3: C4.2 42.539,89.592 Y1.1 45.9,91.05 48.975,94.125 U2.9
NetC7_2: C7.2 U6.3 Y2.1 | length 22.4
  Top Layer w0.3: Y2.1 30.75,70.203 30.75,64.15 31.9,63 32.85,62.05 36.705,62.05 U6.3
  Top Layer w0.5: C7.2@27.55,77.05 27.555,77.045 Y2.1
NetC8_2: C8.2 U6.4 Y2.2 | length 18.6
  Top Layer w0.3: C8.2 29.212,67.338 30.1,66.45 30.1,63.8 32.45,61.45 36.812,61.45 U6.4 ; 32.05,61.85 32.117,61.783
  Top Layer w0.5: Y2.2 27.557,70.897 C8.2
NetC9_2: C9.2 U6.5 Y3.1 | length 13.2
  Top Layer w0.3: C9.2 28.562,59.688 30.058,58.192 34.261,58.192 U6.5
NetC10_2: C10.2 U6.6 Y3.2 | length 16
  Top Layer w0.3: C10.2 29.02,51.412 32.55,54.942 32.55,55.774 U6.6
NetC11_2: C11.2 U6.13 U12.1 | length 29.5
  Top Layer w0.3: v1(34.45,49.25) 34.1,49.6 34.1,51.25 35.2,52.35 35.2,53.1 36.35,54.25 36.35,54.624 U6.13 ; C11.2 39.738,47.588 v1(39.8,47.65) ; U12.1 45.048,47.551 45.65,48.153 v1(45.65,48.75)
  Bottom Layer w0.4: v1(34.45,49.25) 36.05,47.65 45.147,47.65 45.6,48.103 v1@45.6,48.75
NetC18_1: C18.1 D3.2 D4.2 U10.16 | length 16.6
  Top Layer w0.6: U10.16@11.8,56.65 11.8,50.547 C18.1
  Top Layer w0.8: C18.1 13.301,49.045 D3.2
NetC37_2: 
NetC45_1: 
NetC45_2: 
NetC46_1: 
NetC46_2: 
NetC47_2: 
NetC48_1: 
NetC48_2: 
NetC49_1: 
NetC50_2: 
NetC51_2: 
NetC52_2: 
NetC53_2: 
NetC61_1: 
NetC61_2: 
NetC62_2: 
NetC63_2: 
NetC66_1: 
NetC100_1: 
NetC100_2: 
NetC101_1: 
NetC102_1: 
NetC103_1: 
NetC103_2: 
NetC104_2: 
NetC105_2: 
NetC107_1: 
NetC107_2: 
NetC110_1: 
NetC111_1: 
NetC111_2: 
NetC114_1: 
NetC117_1: 
NetC300_2: 
NetC302_1: 
NetC302_2: 
NetC500_1: 
NetC500_2: 
NetC501_1: 
NetC501_2: 
NetC502_1: 
NetC503_1: 
NetC503_1: 
NetC504_1: 
NetC505_1: 
NetC505_2: 
NetC506_2: 
NetC507_2: 
NetC508_1: 
NetC510_1: 
NetC510_2: 
NetC511_1: 
NetC511_2: 
NetC513_1: 
NetC513_2: 
NetC514_1: 
NetC515_1: 
NetC516_1: 
NetC516_2: 
NetC517_1: 
NetC518_2: 
NetC519_2: 
NetC520_1: 
NetC520_2: 
NetC522_2: 
NetC526_2: 
NetC528_2: 
NetC529_2: 
NetC531_2: 
NetC600_1: 
NetC600_2: 
NetD1_1: D1.1 U5.6 | length 13.5
  Top Layer w0.8: U5.6 17.8,105.9 19.941,103.759 D1.1
NetD1_2: 
NetD2_1: D2.1 U5.4 | length 6.5
  Top Layer w0.8: U5.4 23.544,106.606 D2.1
NetD3_1: D3.1 U9.6 | length 2.9
  Top Layer w0.4: D3.1 D3.1@21.75,51.886
  Top Layer w0.8: D3.1@21.75,51.886 U9.6
NetD3_1: 
NetD3_2: 
NetD4_1: D4.1 U9.4 | length 2.8
  Top Layer w0.4: D4.1@16.75,52.004 D4.1@16.809,51.945
  Top Layer w0.8: D4.1@16.75,52.004 U9.4
NetD5_1: 
NetD6_2: D6.2 R17.2 | length 3.5
  Top Layer w0.4: D6.2 37.547,12.457 R17.2
NetD7_2: D7.2 R18.2 | length 3.8
  Top Layer w0.4: D7.2 53.727,12.492 R18.2
NetD8_2: D8.2 R19.2 | length 3.8
  Top Layer w0.4: D8.2 63.791,11.212 R19.2
NetD9_2: D9.2 R20.2 | length 6.4
  Top Layer w0.4: R20.2 73.682,11.162 D9.2
NetD20_2: 
NetD101_1: 
NetD101_2: 
NetD102_1: 
NetD103_1: 
NetD105_1: 
NetD105_2: 
NetD106_1: 
NetD116_2: 
NetD500_1: 
NetD500_2: 
NetD501_1: 
NetD502_1: 
NetD503_1: 
NetD504_1: 
NetD505_1: 
NetD506_2: 
NetD507_1: 
NetD510_1: 
NetDS1_1: 
NetDS1_2: 
NetF1_1: 
NetFU100_1: 
NetFU500_1: 
NetJ1_2: 
NetJ1_2: 
NetJ1_3: 
NetJ1_4: 
NetJ1_5: 
NetJ1_7: 
NetJ301_1: 
NetJ301_2: 
NetJ301_3: 
NetJ301_6: 
NetJ301_10: 
NetJ301_11: 
NetJ600_1: 
NetJP1_2: 
NetJP2_2: 
NetJP2_13: 
NetJP2_14: 
NetJP2_15: 
NetJP3_1: 
NetJP3_2: 
NetJP3_3: 
NetJP3_3: 
NetJP3_4: 
NetJP3_6: 
NetJP3_7: 
NetJP5_5: 
NetJP5_6: 
NetJP5_7: 
NetJP5_9: 
NetJP5_10: 
NetJP5_11: 
NetJP5_12: 
NetJP7_2: 
NetJP7_3: 
NetJP7_4: 
NetJP7_5: 
NetJP7_6: 
NetJP7_7: 
NetJP8_1: 
NetJP8_2: 
NetJP8_3: 
NetJP8_4: 
NetJP9_1: 
NetJP11_1: 
NetJP12_3: 
NetJP12_4: 
NetJP501_9: 
NetJP501_10: 
NetJP501_10: 
NetJP502_1: 
NetJP502_2: 
NetJP502_3: 
NetJP502_4: 
NetL500_10: 
NetQ1_1: Q1.1 R9.1 R10.1 | length 5.8
  Top Layer w0.5: Q1.1 69.19,32.093 R10.1 ; 69.7,32.093 69.707,32.1 R9.1
NetQ1_2: 
NetQ1_3: Q1.3 R8.2 | length 2.7
  Top Layer w0.4: Q1.3 67.748,26.746 R8.2
NetQ2_1: 
NetQ2_3: 
NetQ4_1: 
NetQ5_2: 
NetQ6_1: 
NetQ7_2: Q7.2 R13.2 R34.2 | length 6.9
  Top Layer w0.5: Q7.2 53.59,18.81 ; R34.2 R13.2
NetQ7_4: Q7.4 R15.2 R39.2 | length 7.6
  Top Layer w0.5: R39.2 49.001,24.323 R15.2 ; 49.95,24.323 50.038,24.235 Q7.4
NetQ8_2: Q8.2 R14.2 R77.2 | length 6.9
  Top Layer w0.5: Q8.2 53.603,28.51 R77.2@53.612,28.5 ; R77.2 R14.2
NetQ8_4: Q8.4 R16.2 R78.2 | length 7.9
  Top Layer w0.5: R78.2 49.001,34.247 R16.2 ; 49.95,34.247 50.038,34.159 Q8.4
NetQ9_2: 
NetQ9_4: 
NetQ10_1: 
NetQ10_3: 
NetQ10_3: 
NetQ11_1: 
NetQ11_1: 
NetQ11_3: 
NetQ501_1: Q501.1 R37.2 | length 13.7
  Top Layer w0.3: R37.2 23.107,77.807 24.7,79.4 24.7,81.6 25.748,82.648 Q501.1
NetQ501_3: Q501.3 R38.2 | length 2.8
  Top Layer w0.5: R38.2 29.102,87.254 Q501.3
NetQ502_1: 
NetQ502_3: 
NetQ600_1: 
NetQ600_3: 
NetR1_2: R1.2 U1.3 U2.1 | length 29.2
  Top Layer w0.3: R1.2 33.157,89.407 34.3,90.55 35.9,90.55 37.845,92.495 37.845,95.745 39.45,97.35 53.85,97.35 54.175,97.025 U2.1
NetR2_2: R2.2 U1.5 U2.2 | length 25.5
  Top Layer w0.3: R2.2 35.957,89.457 37.7,91.2 39.8,91.2 40.385,91.785 40.385,96.085 40.95,96.65 53.3,96.65 53.525,96.425 U2.2
NetR3_2: 
NetR3_2: 
NetR3_2: 
NetR3_2: 
NetR3_2: 
NetR3_2: 
NetR3_2: 
NetR4_1: 
NetR5_1: 
NetR5_2: 
NetR6_1: 
NetR6_2: 
NetR7_1: 
NetR7_2: 
NetR7_2: 
NetR8_1: 
NetR8_1: 
NetR8_2: 
NetR8_2: 
NetR11_1: R11.1 U7.3 | length 7.2
  Top Layer w0.3: R11.1 2.819,88.4 7.4,88.4 8.035,87.765 U7.3
NetR12_2: R12.2 U7.7 | length 4.2
  Top Layer w0.3: U7.7 6.765,93.015 8.238,94.488 R12.2
NetR14_2: 
NetR20_1: 
NetR22_2: 
NetR22_2: 
NetR22_2: 
NetR22_2: 
NetR22_2: 
NetR22_2: 
NetR22_2: 
NetR22_2: 
NetR22_2: 
NetR25_1: 
NetR30_2: 
NetR35_2: R35.2 S1.2 | length 10.3
  Top Layer w0.4: S1.2 27.55,7.15 27.55,12.05 29.112,13.612 R35.2
NetR38_1: 
NetR42_1: 
NetR42_2: 
NetR43_1: 
NetR43_2: 
NetR43_2: 
NetR44_1: 
NetR44_2: 
NetR44_2: 
NetR45_2: 
NetR49_1: 
NetR49_2: 
NetR51_1: 
NetR51_2: 
NetR52_1: 
NetR53_1: 
NetR57_1: 
NetR60_1: 
NetR69_2: 
NetR83_1: 
NetR86_1: 
NetR90_2: 
NetR91_1: 
NetR95_1: 
NetR96_2: 
NetR104_1: 
NetR104_2: 
NetR105_2: 
NetR110_1: 
NetR110_2: 
NetR112_1: 
NetR113_1: 
NetR114_1: 
NetR115_1: 
NetR116_1: 
NetR117_2: 
NetR120_1: 
NetR305_2: 
NetR306_2: 
NetR500_2: 
NetR502_2: 
NetR504_1: 
NetR505_2: 
NetR505_2: 
NetR515_1: 
NetR516_1: 
NetR521_2: 
NetR522_2: 
NetR525_1: 
NetR530_2: 
NetR532_1: 
NetR600_1: 
NetR600_2: 
NetR603_1: 
NetR603_2: 
NetR605_2: 
NetS2_1: 
NetU1_1: 
NetU1_4: 
NetU1_5: 
NetU1_12: U1.12 U3.4 | length 10.6
  Top Layer w0.5: U1.12 40.385,104.335 41.35,105.3 44.25,105.3 46.305,103.245 U3.4
NetU1_14: U1.14 U3.1 | length 12.9
  Top Layer w0.5: U1.14 37.845,104.145 40.755,107.055 U3.1
NetU3_13: 
NetU3_14: 
NetU3_16: 
NetU4_1: U4.1 U5.3 | length 3.9
  Top Layer w0.5: U4.1 21.3,93.3 22.8,94.8 U5.3
NetU4_3: U4.3 U5.1 | length 4
  Top Layer w0.5: U5.1 17.8,95.05 19.4,93.45 U4.3
NetU5_1: 
NetU8_1: U8.1 U9.3 | length 3.5
  Top Layer w0.5: U9.3 16.75,66.85 17.6,67.7 U8.1
NetU8_3: U8.3 U9.1 | length 4.5
  Top Layer w0.5: U8.3 20.175,68.825 21.75,67.25 U9.1
NetU8_7: 
NetU8_8: 
NetU11_5: 
NetU14_3: 
NetU14_4: 
NetU14_5: 
NetU14_6: 
NetU14_12: 
NetU14_13: 
NetU14_14: 
NetU15_3: 
NetU15_3: 
NetU15_3: 
NetU15_3: 
NetU15_4: 
NetU15_5: 
NetU15_5: 
NetU15_5: 
NetU15_5: 
NetU15_5: 
NetU15_5: 
NetU15_7: 
NetU15_7: 
NetU15_9: 
NetU15_10: 
NetU15_15: 
NetU16_3: 
NetU16_4: 
NetU16_6: 
NetU19_4: 
NetU21_1: 
NetU21_2: 
NetU103_4: 
NetU500_3: 
NetU500_6: 
NetU503_4: 
NetU600_3: 
NetX11_1: 
NetX13_1: 
NetX15_1: 
NetX19_1: 
NetX23_1: 
NetX32_1: 
NetX33_1: 
NRST: C12.2 JP5.10 R35.1 U6.7 | length 106.5
  Top Layer w0.3: C12.2 13.243,87.893 v1(13.25,87.887) ; JP5.10 15.722,84.222 17.3,85.8 18.7,85.8 18.95,85.55 18.95,81 18.55,80.6 18.55,79.85 20.05,78.35 20.05,74.7 v1(18.7,73.35) ; v1(32,71.5) 32,64.85 32.9,63.95 v1(33.5,63.95) ; 32.25,48.45 32.25,53.65 33.15,54.55 33.15,55.667 U6.7 ; 33.361,55.877 33.888,55.35 v1(34,55.35)
  Top Layer w0.4: R35.1 31.793,37.4 31.15,38.043 31.15,39.2 31.793,39.843 31.793,42.543 33.75,44.5 33.75,46.95 32.25,48.45
  Bottom Layer w0.3: v1(13.25,87.887) 13.25,86.161 JP5.10 ; v1(18.7,73.35) 23.15,73.35 24.35,72.15 31.35,72.15 v1(32,71.5) ; v1(33.5,63.95) 33.5,55.85 v1(34,55.35)
OFF1: 
OFF2: 
P0_0: 
P0_1: 
P0_2: 
P0_2: 
P0_2: 
P0_2: 
P0_2: 
P0_2: 
P0_3: 
P0_3: 
P0_3: 
P0_3: 
P0_3: 
P0_3: 
P0_3: 
P0_4: 
P0_5: 
P0_6: 
P0_7: 
P0_8: 
P0_8: 
P0_8: 
P0_8: 
P0_8: 
P0_8: 
P0_8: 
P0_8: 
P0_8: 
P0_8: 
P0_8: 
P0_8: 
P0_8: 
P0_8_: 
P0_8_: 
P0_8_: 
P0_9: 
P0_9: 
P0_9: 
P0_9_: 
P0_9_: 
P0_9_: 
P0_9_: 
P0_10: 
P0_11: 
P0_13: 
P0_15: 
P0_16: 
P0_17: 
P0_18: 
P0_19: 
P0_19: 
P0_20: 
P0_21: 
P0_23: 
P0_24: 
P0_25: 
P0_25: 
P0_25: 
P0_25: 
P0_25: 
P0_25: 
P0_25: 
P0_25: 
P0_25: 
P0_25: 
P0_25: 
P0_27: 
P0_27: 
P0_27: 
P0_27: 
P0_27: 
P0_27: 
P0_27: 
P0_27: 
P0_27: 
P0_27: 
P0_27: 
P0_27: 
P0_27: 
P0_28: 
P0_29: 
P0_30: 
P1_0: 
P1_1: 
P1_4: 
P1_8: 
P1_9: 
P1_10: 
P1_14: 
P1_15: 
P1_16: 
P1_17: 
P1_18: 
P1_19: 
P1_20: 
P1_21: 
P1_21: 
P1_22: 
P1_22: 
P1_22: 
P1_22: 
P1_22: 
P1_22: 
P1_22: 
P1_22: 
P1_23: 
P1_24: 
P1_25: 
P1_25: 
P1_25: 
P1_25: 
P1_25: 
P1_25: 
P1_26: 
P1_27: 
P1_28: 
P1_29: 
P1_29: 
P1_29: 
P1_29: 
P1_29: 
P1_30: 
P1_31: 
P1_31: 
P1_31: 
P1_31: 
P1_31: 
P1_31: 
P1_31: 
P1_31: 
P1_31: 
P1_31: 
P1_31: 
P1_31: 
P1_31: 
P1_31: 
P2_0: 
P2_1: 
P2_7: 
P2_8: 
P2_9: 
P2_9: 
P2_9: 
P2_9: 
P2_9: 
P2_9: 
P2_9: 
P2_9: 
P2_9: 
P2_9: 
P2_9: 
P2_9: 
P2_9: 
P2_9: 
P2_9: 
P2_9: 
P2_9: 
P2_9: 
P2_9: 
P2_9: 
P2_9: 
P2_9: 
P2_9: 
P2_9: 
P2_9: 
P2_9: 
P2_9: 
P2_9: 
P2_9: 
P2_9: 
P2_9: 
P2_9: 
P2_9: 
P2_9: 
P2_9: 
P2_10: 
P2_13: 
P3_25: 
P3_26: 
PB1: 
PB1: 
PB2: 
PB2: 
PB3: 
PB3: 
PE6: 
PE6: 
PE7: 
PQ3: 
PQ4: 
PQ5: 
PQ6: 
PROG0: 
PROG1: 
PROG1: 
PROG1: 
PWM: 
PWM1: 
PWM2: 
REL1: JP2.3 Q7.5 Q7.6 | length 8.5
  Top Layer w0.6: JP2.3 41.36,22.99 43,21.35 ; Q7.6 43.03,20.08 43,20.05 43,21.35 ; Q7.5 43,21.35
REL1: 
REL2: JP2.1 Q7.7 Q7.8 | length 9.3
  Top Layer w0.6: JP2.1 40.15,19.45 41.45,18.15 43,18.15 ; 43,18.8 43,17.55 43.01,17.54 Q7.8 ; 43.01,18.81 Q7.7
REL3: JP2.7 Q8.5 Q8.6 | length 8.8
  Top Layer w0.6: JP2.7 42.48,30.4 43.03,30.4 ; 43,29.75 43.03,29.78 ; Q8.6 43.03,29.78 ; Q8.5 43,31.05 43.03,31.02 43.03,29.78
REL4: JP2.5 Q8.7 Q8.8 | length 8.6
  Top Layer w0.6: JP2.5 41.35,25.53 43.06,27.24 ; Q8.8 43.06,27.24 ; Q8.7 43.04,28.51 43,28.55 43,27.3 43.06,27.24
REL4: 
REL5: 
REL6: 
RES: 
RS485A: JP4.1 U10.12 | length 56.5
  Top Layer w0.6: v1(2.7,40.2) 2.7,49.15 6.715,53.165 U10.12
  Bottom Layer w0.8: v1(2.7,40.2) 2.7,14.55 11.75,5.5 JP4.1
RS485B: JP4.2 U10.13 | length 57.6
  Top Layer w0.6: v1(4.55,39.15) 4.55,48.95 7.985,52.385 U10.13
  Bottom Layer w0.8: v1(4.55,39.15) 4.55,18 16.75,5.8 JP4.2
RX: 
RXCAN: 
SK1: 
SK2: 
SK3: 
SK4: 
T3: 
T3: 
TD1: 
TX: 
U2: 
U5: 
U6: 
U7: 
U8: 
UAKB: 
UB1: JP1.9 R21.2 | length 5.3
  Top Layer w0.4: R21.2 71.043,91.543 73.34,93.84 JP1.9
UB2: JP1.10 R23.2 | length 4.3
  Top Layer w0.4: JP1.10 80.504,93.84 R23.2
UBM1: 
UBM2: 
UF: JP2.10 R40.1 | length 20.7
  Top Layer w0.4: R40.1@27.388,41.143 27.397,41.134 v1(27.397,30.65)
  Bottom Layer w0.4: v1(27.397,30.65) 27.437,30.61 JP2.10
UIB1: 
UIB2: 
ULOAD: 
UN1: JP2.2 R25.2 | length 19
  Top Layer w0.3: R25.2 34.35,37.669 34.35,23.71 JP2.2
UN2: JP2.4 R27.2 | length 16.9
  Top Layer w0.3: JP2.4 35.4,25.2 35.4,32 37.77,34.37 R27.2
UN3: JP2.6 R29.2 | length 15.8
  Top Layer w0.3: JP2.6 37.57,25.53 36.2,26.9 36.2,31.4 38.3,33.5 39.65,33.5 40.884,34.734 R29.2
US: 
US1: 
US1: 
US1: 
US1: 
US1: 
US1: 
US1: 
US1: 
US1: 
UT1: JP2.8 R31.1 R32.1 | length 16.7
  Top Layer w0.3: JP2.8 37.61,28.16 38.85,29.4 38.85,31.4 39.65,32.2 41.5,32.2 43.998,34.698 R31.1 R32.1 R32.1@47.05,37.976
UU3: 
UU4: 
UU5: 
UU6: 
UU7: 
UU8: 
UU9: 
UU10: 
UU11: 
UU12: 
UU13: 
UU14: 
VBAT: D5.2 U6.1 | length 113.7
  Top Layer w0.3: v1(30.1,74.3) 30.1,71.95 31.4,70.65 31.4,64.55 32.624,63.326 33.3,62.65 35.891,62.65 U6.1
  Top Layer w0.4: v1@65.8,36 65.8,44.8 68.4,47.4 68.4,67.35 66.797,68.953 66.797,71.297 69.55,74.05 v1(69.55,75.4) ; D5.2 77.205,34.995 v1(77.6,34.6)
  Bottom Layer w0.4: v1(30.1,74.3) 30.2,74.2 51.2,74.2 51.8,74.8 61.1,74.8 61.7,75.4 v1(69.55,75.4) ; v1@66.05,35.7 76.5,35.7 v1(77.6,34.6)
  other v1: 66.15,36.05
VREF: 
VREF: 
VREF: 
VREF: 
VREF: 
VREF: 
VREF: 
VREF: 
VREF: 
VREF: 
VREF: 
VREF: 
VS: 
VS: 
WD_RES: 
pads on no net: JP1.7 JP1.8 JP1.11 JP1.12 JP1.13 JP1.14 JP1.15 JP1.16 JP3.7 JP3.8 JP6.5 S1.0 U1.4 U1.6 U1.7 U1.10 U1.11 U1.13 U2.3 U2.4 U2.5 U2.6 U2.7 U2.11 U2.12 U2.13 U2.15 U3.5 U6.2 U6.10 U6.11 U6.40 U6.41 U6.45 U6.52 U6.53 U6.54 U6.57 U6.58 U6.59 U10.10 U10.11 U10.14

## Polygon pours and split planes (outlines as drawn)
GND on Top Layer (hatched 90Degree grid 0.1 track 0.3, remove dead copper): 36.2,66.65 36.2,63.45 41.9,57.75 45.3,57.75 50.8,63.25 50.8,66.771 45.371,72.2 41.7,72.2 36.15,66.65
GND on Top Layer (hatched 90Degree grid 0.1 track 0.3, remove dead copper): 85.75,7.1 21.1,7.1 21.1,42.55 25.6,47.05 25.6,62.75 -0.55,62.75 -0.55,100.95 19.8,100.95 26.7,94.05 35.25,94.05 38.5,97.3 53.922,97.3 56.022,95.2 85.7,95.2 85.7,7.05
+3V3 on Bottom Layer (hatched 90Degree grid 0.1 track 0.3, remove dead copper): 36.2,63.45 41.9,57.75 45.3,57.75 50.8,63.25 50.8,66.75 45.35,72.2 41.75,72.2 36.3,66.75 36.2,66.65
GND on Bottom Layer (hatched 90Degree grid 0.1 track 0.3, remove dead copper): 87.2,7.1 21.1,7.1 21.1,42.6 25.6,47.1 25.6,62.6 5.2,62.6 5.2,95.1 11.05,100.95 19.85,100.95 26.7,94.1 35.3,94.1 38.55,97.35 54,97.35 56.05,95.3 86.5,95.3 86.5,7.05 86.35,7.05

## Keep-outs
Keep-Out Layer:
  circle w0.254: c36.3,-20 r1.6
  circle w0.254: c48.7,-20 r1.6
  circle w0.254: c61.3,-20 r1.6
  circle w0.254: c73.75,-20 r1.6
  lines w0.254: 32.4,-25 77.45,-25 77.35,-24.9 77.35,-10 72.45,-10 72.45,-5 67.45,-5 67.45,-10 42.45,-10 42.45,-5 37.45,-5 37.45,-10 32.4,-10 32.4,-25 ; 37.5,1.5 cw(c37.5,2.5) 37.5,3.5 42.5,3.5 cw(c42.5,2.5) 42.5,1.5 37.5,1.5 ; 67.5,1.5 cw(c67.5,2.5) 67.5,3.5 72.5,3.5 cw(c72.5,2.5) 72.5,1.5 67.5,1.5
  lines w0.3: 0,0 0,112 85,112 85,0 76,0 76,-5 9,-5 9,0 0,0

## Silkscreen, mask and mechanical layers (free items; w line width, h text height)
Mechanical 4:
  rectangle: 35,0.25 44.95,4.95
  rectangle: 65,-0.05 74.85,5
  rectangle: 37.55,-10 42.4,-5.2
  rectangle: 67.5,-9.9 72.4,-5.1

## Text inside footprints (layer, text, board x,y; h text height)
JP1: Top Overlay "20" at 75.682,79.616 h1 r270; Top Overlay "19" at 73.142,79.616 h1 r270; Top Overlay "1" at 73.142,106.54 h1 r270; Top Overlay "2" at 75.682,106.54 h1 r270
JP2: Top Overlay "2" at 38.118,17.91 h1 r90; Top Overlay "1" at 40.658,18.418 h1 r90; Top Overlay "9" at 40.658,32.134 h1 r90; Top Overlay "10" at 38.118,32.134 h1 r90